# Altium PCB pcb.PcbDoc
Units mm, origin at the board's own origin, x right, y up, seen from the top; angles counter-clockwise.
Board outline 100 x 100 mm, 2 copper layers (Top Layer, Bottom Layer); 24 components, 18 nets, 68 pads, 8 vias.
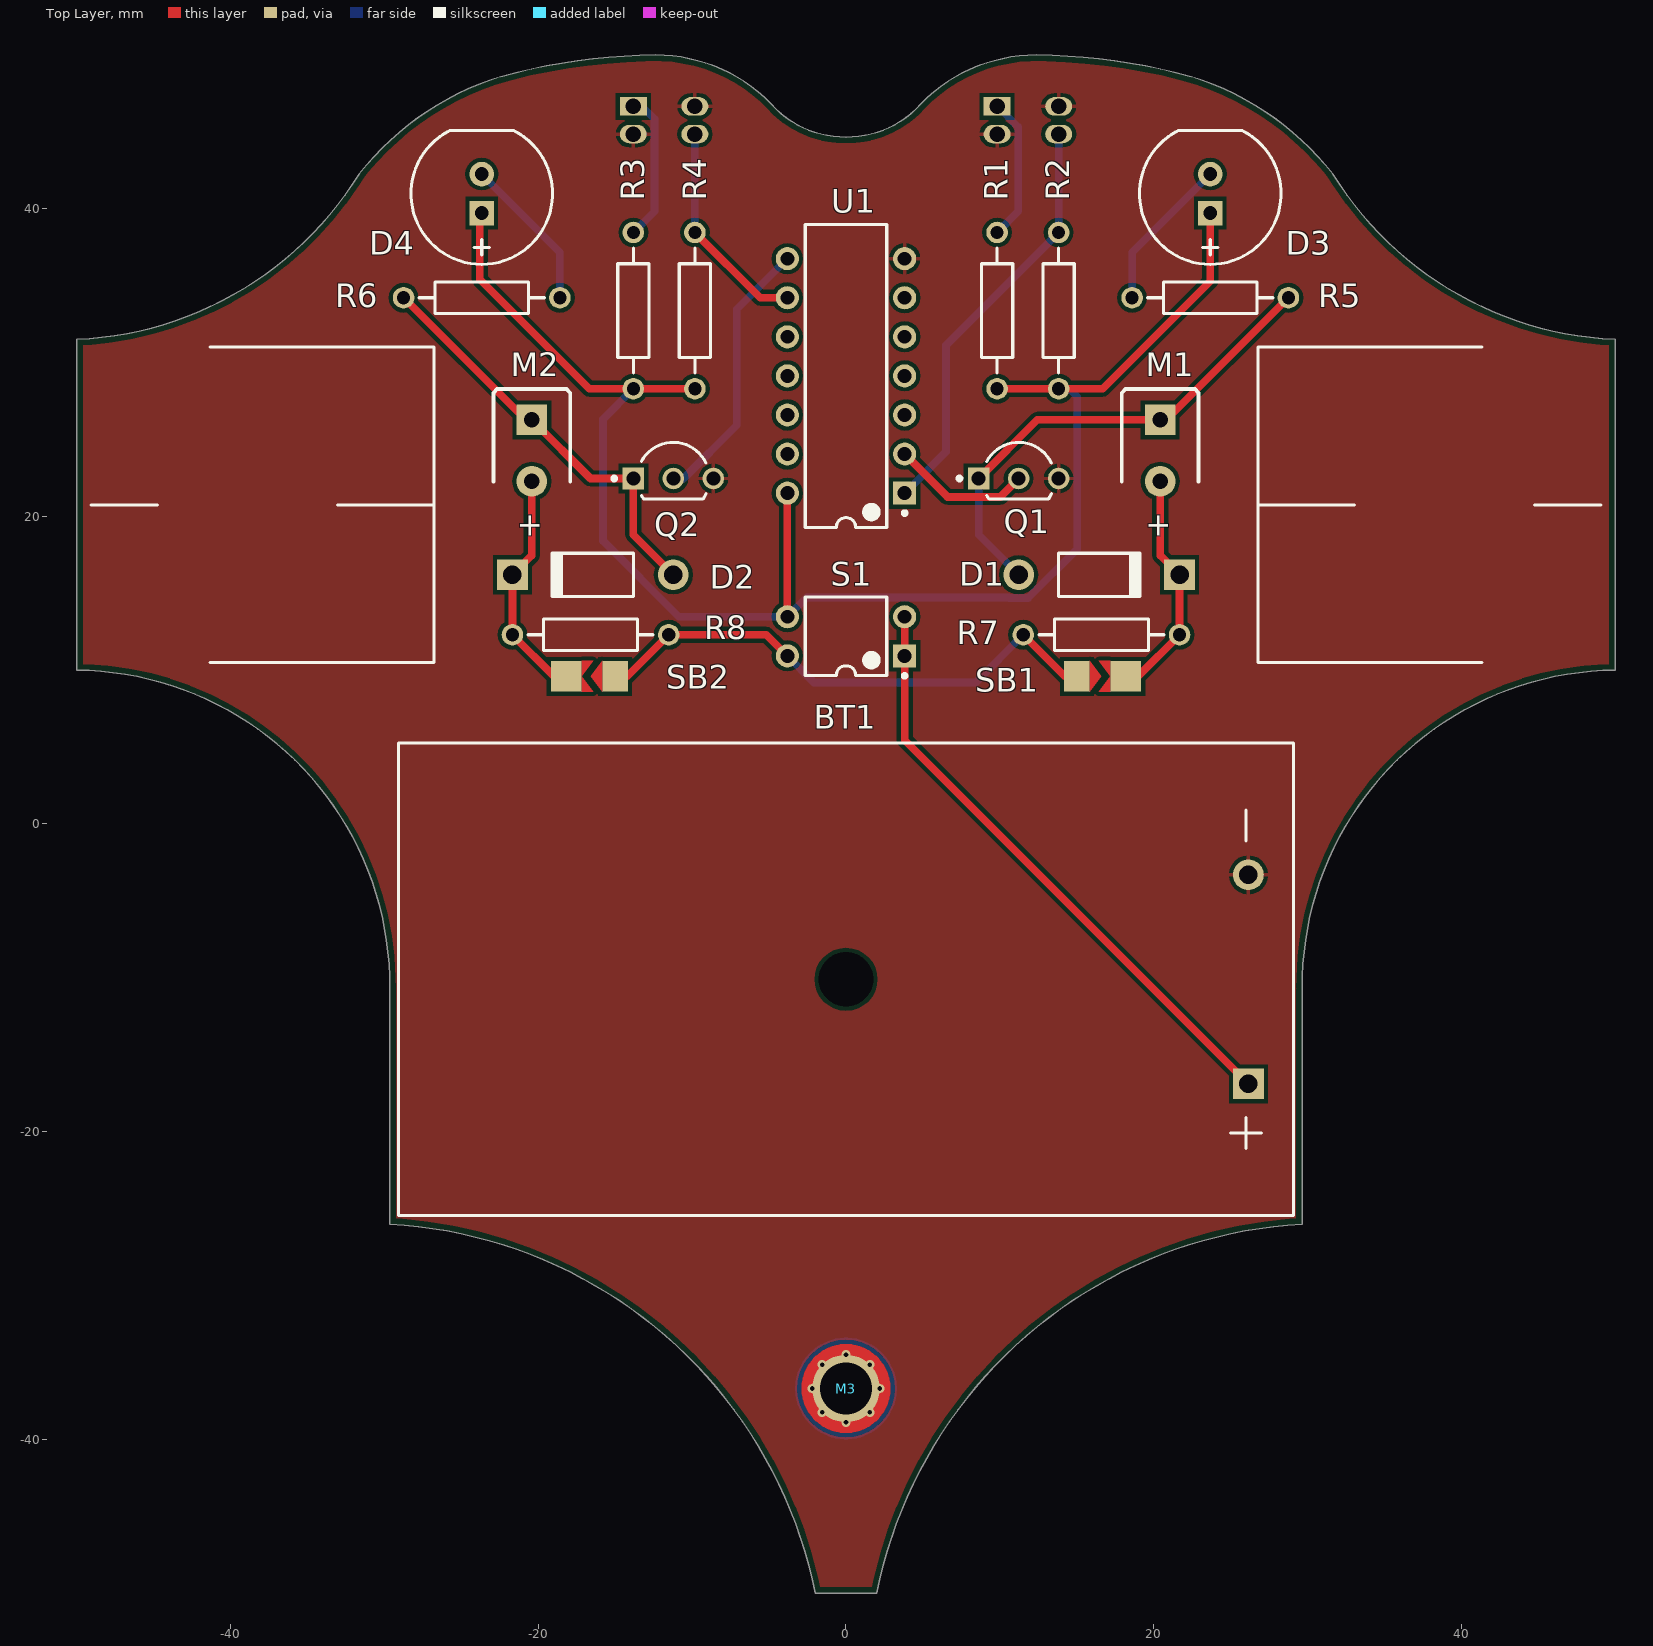
[diagram p0: Top Layer view]
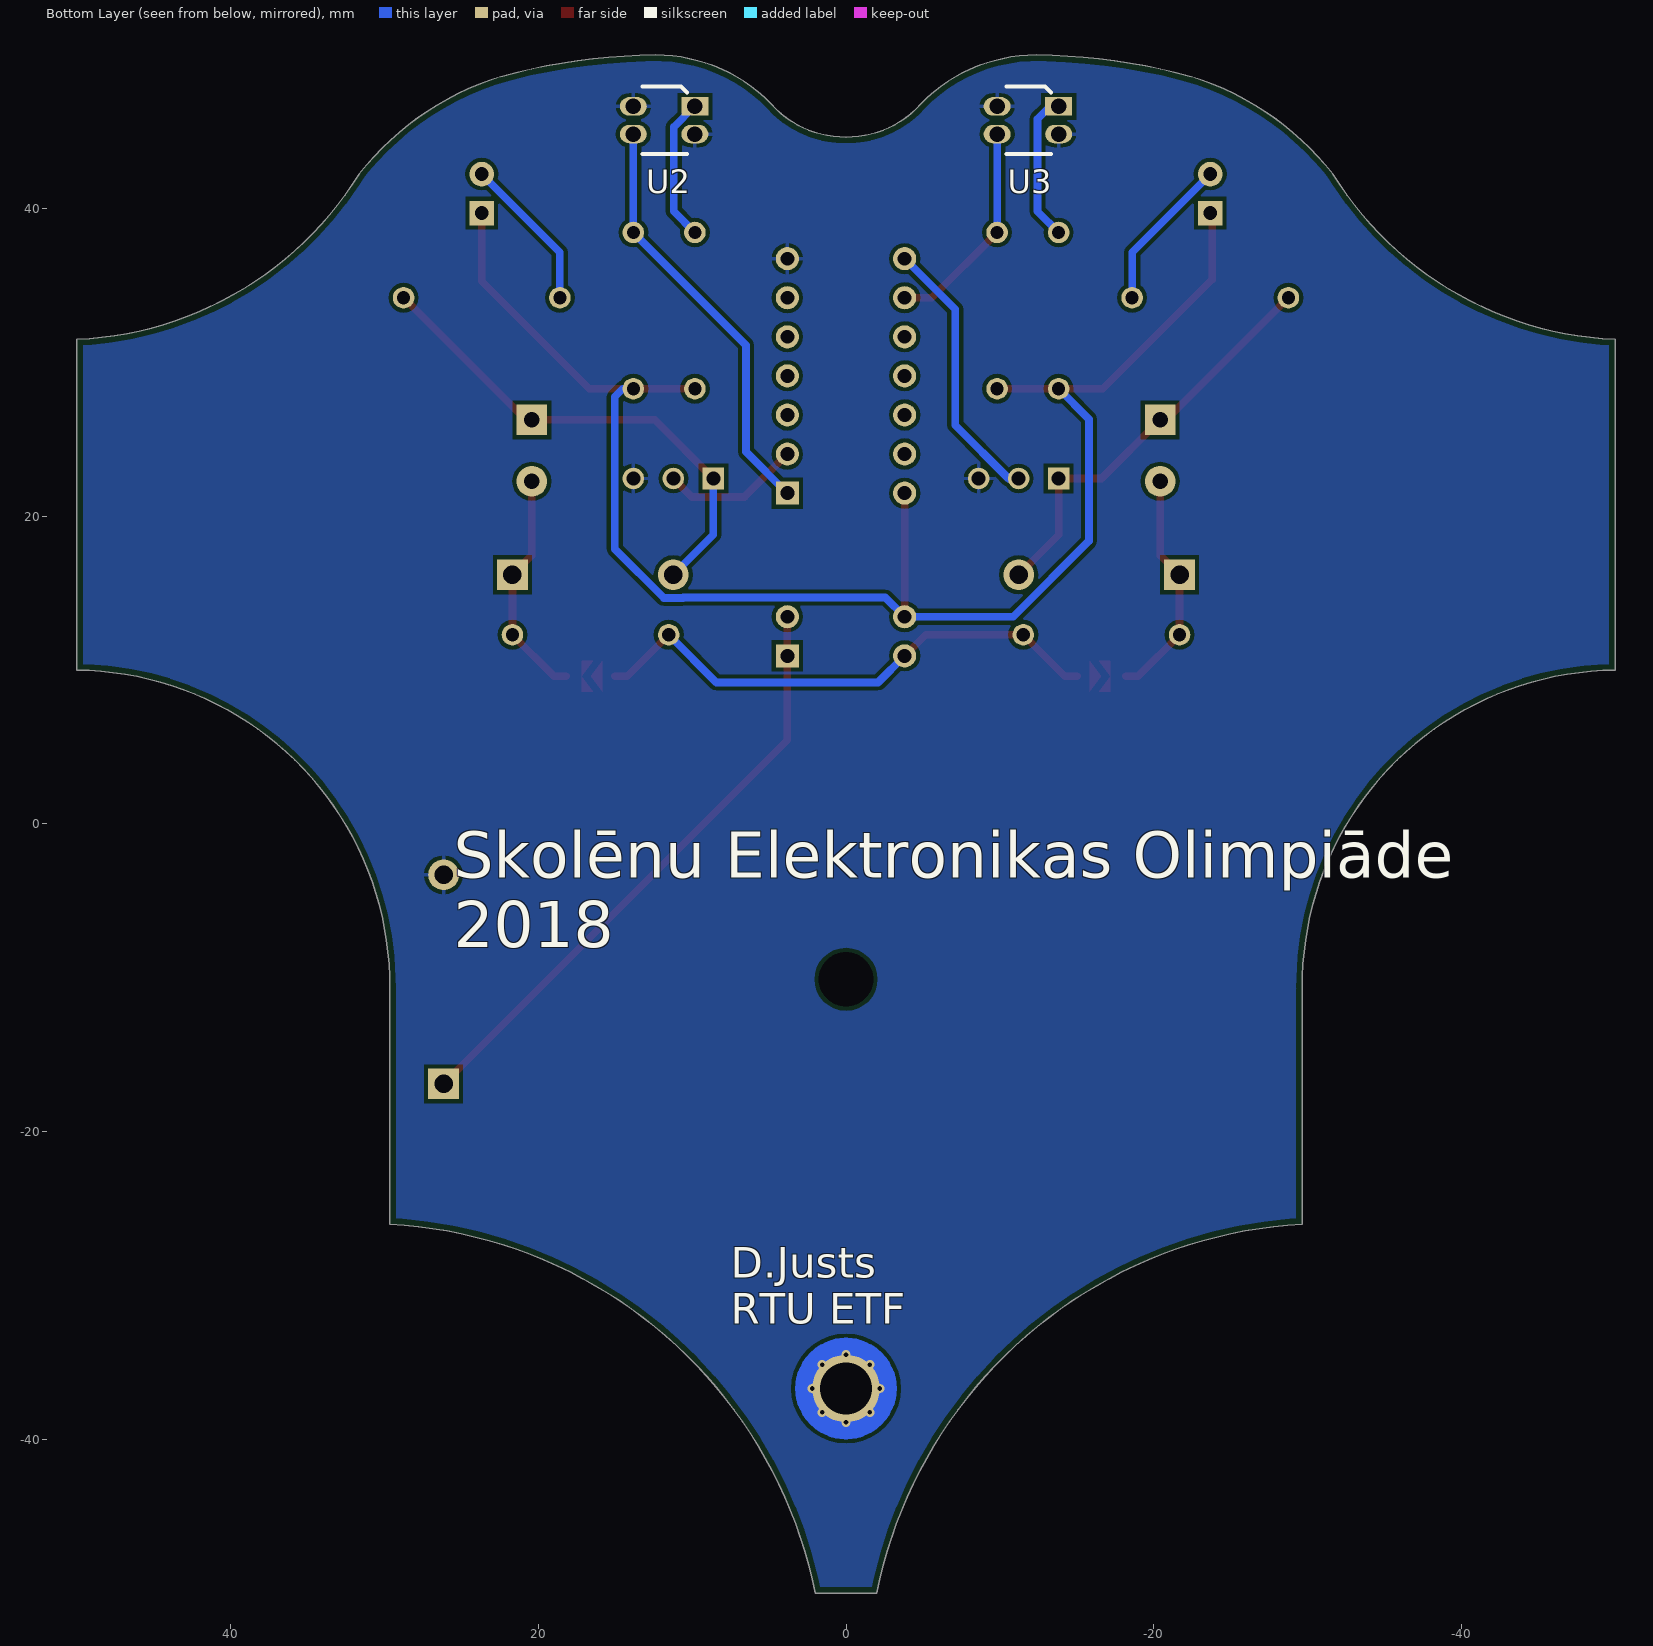
[diagram p1: Bottom Layer view, seen from below]

## Layer stack, top to bottom
Top Solder: solder mask 0.0102, Solder Resist, Dk 3.5
Top Layer: signal copper 0.0356
Dielectric 1: dielectric 0.32, FR-4, Dk 4.8
Bottom Layer: signal copper 0.0356
Bottom Solder: solder mask 0.0102, Solder Resist, Dk 3.5

## Board outline
-29.662,-26.02 -29.662,-10.675 ccw(c-50.169,-10.506) -50,10 -50,31.5 ccw(c-50.992,54.223) -31.654,42.25 cw(c-16.84,30.597) -22.444,48.593 cw(c-11.982,10.433) -12.375,49.999 cw(c-12.387,39.515) -4.525,46.45 ccw(c-0.016,51.198) 0,44.65 ccw(c0.016,51.198) 4.525,46.45 cw(c12.387,39.515) 12.375,49.999 cw(c11.982,10.433) 22.444,48.593 cw(c16.84,30.597) 31.654,42.25 ccw(c50.992,54.223) 50,31.5 50,10 ccw(c50.169,-10.506) 29.662,-10.675 29.662,-26.02 ccw(c31.295,-55.849) 2,-50 -2,-50 ccw(c-31.295,-55.849)

## Design rules (kind name [scope] priority, off if disabled: settings)
BoardOutlineClearance [All] p1: gap=0.4 ignorepadtopadclearanceinfootprint=FALSE
Clearance [All] p1: gap=0.254 ignorepadtopadclearanceinfootprint=FALSE except(0: Arc-Hole Track-Hole SMDPad-Hole THPad-Hole Via-Hole Fill-Hole Poly-Hole Region-Hole Text-Hole)
HoleSize [All] p1: absolutevalues=TRUE maxlimit=3.6 minlimit=0.025 maxpercent=80.000 minpercent=20.000
PolygonConnect [All] p1: connectstyle=Relief reliefconductorwidth=0.254 reliefentries=4 polygonreliefangle="90 Angle" airgapwidth=0.254
RoutingVias [All] p1: holewidth=0.711 width=1.27 viastyle="Through Hole" minholewidth=0.711 minwidth=1.27 maxholewidth=0.711 maxwidth=1.27
SolderMaskExpansion [All] p1: expansion=0.102
Width Width_1 [InComponent('M3')] p1: maxlimit=2 minlimit=0.1 preferedwidth=0.254 minimp=50.000000 maximp=50.000000 favimp=50.000000
Width [All] p2: maxlimit=1 minlimit=0.3 preferedwidth=0.5 minimp=50.000000 maximp=50.000000 favimp=50.000000
29 further rules are at their usual default settings.

## Components (designator, comment, footprint, x,y, rotation, side; value= is the part's Value field where it differs from the comment)
BT1 "Battery" BC2AAPC 0,-10.1 r0 top
D1 "Diode 1N4001" DO-41 16.455,16.2 r0 top
D2 "Diode 1N4001" DO-41 -16.455,16.2 r180 top
D3 "LED" LED 23.68,40.98 r90 top locked
D4 "LED" LED -23.68,40.98 r90 top locked
M1 "Motor" "Motor Wire Footprint" 20.425,24.275 r270 top
M2 "Motor" "Motor Wire Footprint" -20.425,24.275 r270 top
M3 "Comment" LIBRARYSOURCE=Vault 0,-36.7 r0 top
Q1 "BC517RL1" ONSC-TO-92-3-29-11_AM_BL 11.225,22.46 r0 top
Q2 "BC517RL1" ONSC-TO-92-3-29-11_AM_BL -11.225,22.46 r0 top
R1 "Res2" AXIAL-0.4 9.825,33.373 r270 top locked
R2 "Res2" AXIAL-0.4 13.825,33.373 r270 top locked
R3 "Res2" AXIAL-0.4 -13.825,33.373 r270 top locked
R4 "Res2" AXIAL-0.4 -9.825,33.373 r270 top locked
R5 "Res2" AXIAL-0.4 23.68,34.21 r180 top locked
R6 "Res2" AXIAL-0.4 -23.68,34.21 r0 top locked
R7 "Res2" AXIAL-0.4 16.605,12.3 r180 top
R8 "Res2" AXIAL-0.4 -16.605,12.3 r0 top
S1 "SW DIP-2" DIP-4 0,12.2 r180 top
SB1 "Solder Bridge" "Solder Bridge" 16.6,9.6 r0 top
SB2 "Solder Bridge" "Solder Bridge" -16.6,9.6 r180 top
U1 "SN74HC14N" N0014A 0,29.13 r180 top
U2 "QRE1113" QRE1113_THD 11.825,45.75 r0 bottom locked
U3 "QRE1113" QRE1113_THD -11.825,45.75 r0 bottom locked

## Footprints (in the part's own frame and the unit in brackets; to place one, negate y for a bottom-side part, rotate by r counter-clockwise, add the part's x,y. Pads: shape width x height; smd on the part's side, far side on the other; paste and mask are expansions set on the pad)
AXIAL-0.4 [mm] "Axial Device, Thru-Hole; 2 Leads; 0.4 in Pin Spacing"
  round 1.4 hole 0.85: 1(-5.08,0) 2(5.08,0)
  silkscreen extent -4.06,-1.02 4.06,1.02
BC2AAPC [mm] "BC2AAPC Battery Holder 58x30.5x15mm, For 2xAA batteries"
  rect 2x2 hole 1.2: 1(26.16,-6.795)
  round 2 hole 1.2: 2(26.16,6.795)
  round 2 hole 3.56 unplated: MH(0,0)
  silkscreen extent -29.1,-15.36 29.1,15.36, body extent -28.96,-15.24 28.96,15.24, height 15
DIP-4 [mm] "DIP; 4 Leads; Row Spacing 7.62 mm; Pitch 2.54 mm"
  rect 1.5x1.5 hole 0.9: 1(-3.81,1.27)
  round 1.5 hole 0.9: 2(-3.81,-1.27) 3(3.81,-1.27) 4(3.81,1.27)
  silkscreen extent -3.94,-2.55 2.65,2.69, body extent -3.15,-2.5 3.15,2.5, height 5.6
DO-41 [mm] "Diode, Axial; Body 5.2 x 2.7 mm (LxDia. max), Lead Dia. 0.86 mm (max)"
  round 2 hole 1.2: 1(-5.23,0)
  rect 2x2 hole 1.2: 2(5.23,0)
  silkscreen extent -2.65,-1.4 2.75,1.4
LED [mm] "THD LED Bulb dia - 8mm, Height - 11mm, Hole size - 0.9mm, Pad spacing - 2.54mm"
  rect 1.6x1.6 hole 0.9: 1(-1.27,0)
  round 1.6 hole 0.9: 2(1.27,0)
  silkscreen extent -4.6,-4.6 4.09,4.6
LIBRARYSOURCE=Vault [mm] "Mounting Hole, Altium, 4.4mm pad, 3.4mm plated hole"
  round 4.4 hole 3.4 mask+0.038: MOUNT(0,0)
  Top Layer circle w1: c0,0 r2.4
  Bottom Layer circle w1.2: c0,0 r2.702
"Motor Wire Footprint" [mm]
  round 2 hole 1: 1(2,0)
  rect 2x2 hole 1: 2(-2,0)
  silkscreen extent -4,-2.5 2,2.5
N0014A [mm] "DIP, 14-Leads, Body 19.7x6.6mm, Pitch 2.54mm"
  rect 1.5x1.5 hole 0.9: 1(-3.81,7.62)
  round 1.5 hole 0.9: 2(-3.81,5.08) 3(-3.81,2.54) 4(-3.81,0) 5(-3.81,-2.54) 6(-3.81,-5.08) 7(-3.81,-7.62) 8(3.81,-7.62) 9(3.81,-5.08) 10(3.81,-2.54) 11(3.81,0) 12(3.81,2.54) 13(3.81,5.08) 14(3.81,7.62)
  silkscreen extent -3.94,-9.85 2.65,9.85, body extent -3.95,-9.85 3.95,9.85, height 5.08
ONSC-TO-92-3-29-11_AM_BL [mm] "TO, 3-Leads, Body Dia 4.7mm, Pitch 2.6mm"
  rect 1.4x1.4 hole 0.9: 1(-2.6,0)
  round 1.4 hole 0.9: 2(0,0) 3(2.6,0)
  silkscreen extent -3.97,-1.34 2.13,2.35, body extent -2.84,-1.34 2.84,2.35, height 5.33
QRE1113_THD [mm]
  rect 1.75x1.2 hole 1: 1(-2,-0.9)
  oval 1.75x1.2 hole 1: 2(2,-0.9) 3(2,0.9) 4(-2,0.9)
  silkscreen extent -1.5,-2.2 1.4,2.2, body extent -1.35,-1.7 1.35,1.7, height 1.6
"Solder Bridge" [mm] "Solder Bridge 5x2mm, gap 0.6mm"
  rect 1.65x2 smd: 1(-1.587,0)
  rect 2x2 smd: 2(1.587,0)
  Top Layer region: 0.587,0 0.587,-1 -0.162,-1
  Top Layer region: -0.162,1 0.587,1 0.587,0
  Top Layer region: -0.012,0 -0.763,1 -0.763,-1

## Part data
BT1: "Multicell Battery"
D1 D2: "1 Amp General Purpose Rectifier"
D3 D4: library part LED0, "Typical INFRARED GaAs LED"
M1 M2: "Motor, General Kind"
Q1 Q2: library part CMP-1031-00058-1, "Darlington Transistor, NPN Silicon, 3-Pin TO-92, Tape and Reel"
R1 R2 R3 R4 R5 R6 R7 R8: "Resistor"
S1: "DIP Switch, 2 Position, SPST"
U1: library part CMP-1615-00889-3, "Hex Schmitt-Trigger Inverters, N0014A, TUBE"
U2 U3: library part CMP-2000-06919-1, "Miniature Reflective Object Sensor, 30 V, -40 to 85 degC, 4-Pin THD, RoHS, Tape and Reel"

## Via types
v1: diameter 0.6, hole 0.3, Top Layer to Bottom Layer, 8 vias

## Nets (pads, with @x,y where several pads share a name; then routed paths per layer and width w, separated by ;. In a path a pad name is that pad's centre, name@x,y a point inside that pad or via, vN(x,y) a via of type N, cw(c..) or ccw(c..) an arc to the next point about the centre after c; other vN are vias at no path point)
GND: BT1.2 Q1.3 Q2.3 U1.7 U2.2 U2.4 U3.2 U3.4
M3: M3.MOUNT
  other v1: 0,-38.9 -1.556,-38.256 1.556,-38.256 -2.2,-36.7 2.2,-36.7 -1.556,-35.144 1.556,-35.144 0,-34.5
NetBT1_1: BT1.1 S1.1 S1.2 | length 39.6
  Top Layer w0.5: S1.2 S1.1 3.81,5.455 BT1.1
NetD1_1: D1.1 M1.2 Q1.1 R5.1 | length 32.3
  Top Layer w0.5: Q1.1 12.44,26.275 M1.2 20.825,26.275 R5.1
  Bottom Layer w0.5: Q1.1 8.625,18.8 D1.1
NetD1_2: D1.2 M1.1 R7.1 SB1.2 | length 15.1
  Top Layer w0.5: SB1.2 18.985,9.6 R7.1 D1.2 20.425,17.46 M1.1
NetD2_1: D2.1 M2.2 Q2.1 R6.1 | length 27.1
  Top Layer w0.5: R6.1 -20.825,26.275 M2.2 -16.611,22.46 Q2.1 -13.825,18.8 D2.1
NetD2_2: D2.2 M2.1 R8.1 SB2.2 | length 15.1
  Top Layer w0.5: M2.1 -20.425,17.46 D2.2 R8.1 -18.985,9.6 SB2.2
NetD3_2: D3.2 R5.2 | length 10.1
  Bottom Layer w0.5: R5.2 18.6,37.17 D3.2
NetD4_2: D4.2 R6.2 | length 10.1
  Bottom Layer w0.5: D4.2 -18.6,37.17 R6.2
NetQ1_2: Q1.2 U1.2 | length 9.1
  Top Layer w0.5: U1.2 6.604,21.256 10.021,21.256 Q1.2
NetQ2_2: Q2.2 U1.8 | length 17.7
  Bottom Layer w0.5: Q2.2 -10.565,22.46 -7.1,25.925 -7.1,33.46 U1.8
NetR1_1: R1.1 U2.1 | length 9.4
  Bottom Layer w0.5: R1.1 11.204,39.832 11.204,45.307 9.861,46.65 U2.1
NetR2_1: R2.1 U1.1 U2.3 | length 27.5
  Bottom Layer w0.5: U1.1 6.5,24.2 6.5,31.128 R2.1 U2.3
NetR3_1: R3.1 U3.1 | length 9.7
  Bottom Layer w0.5: R3.1 -12.446,39.832 -12.446,45.825 -13.271,46.65 U3.1
NetR4_1: R4.1 U1.9 U3.3 | length 14.2
  Top Layer w0.5: R4.1 -5.582,34.21 U1.9
  Bottom Layer w0.5: R4.1 U3.3
SCREW: 
VCC: D3.1 D4.1 R1.2 R2.2 R3.2 R4.2 S1.3 U1.14 | length 107.2
  Top Layer w0.5: D4.1 -23.8,39.59 -23.8,35.4 -16.693,28.293 R3.2 R4.2 ; S1.3 U1.14 ; R1.2 R2.2 16.693,28.293 23.68,35.28 D3.1
  Bottom Layer w0.5: R3.2 -15.8,26.318 -15.8,18.4 -10.87,13.47 S1.3 -2.556,14.724 10.574,14.724 10.602,14.696 11.848,14.696 15.029,17.877 15.029,27.771 14.507,28.293 R2.2
VMOT: R7.2 R8.2 S1.4 SB1.1 SB2.1 | length 34.8
  Top Layer w0.5: SB2.1 -14.225,9.6 R8.2 -5.18,12.3 S1.4 ; R7.2 14.225,9.6 SB1.1
  Bottom Layer w0.5: S1.4 -2.08,9.2 8.425,9.2 R7.2
pads on no net: BT1.MH U1.3 U1.4 U1.5 U1.6 U1.10 U1.11 U1.12 U1.13

## Polygon pours and split planes (outlines as drawn)
GND on Bottom Layer "GND" (solid, remove dead copper, pour order 0): -29.662,-26.02 -29.662,-10.675 ccw(c-50.169,-10.506) -50,10 -50,31.5 ccw(c-50.992,54.223) -31.654,42.25 cw(c-16.84,30.597) -22.444,48.593 cw(c-11.982,10.433) -12.375,49.999 cw(c-12.387,39.515) -4.525,46.45 ccw(c-0.016,51.198) 0,44.65 ccw(c0.016,51.198) 4.525,46.45 cw(c12.387,39.515) 12.375,49.999 cw(c11.982,10.433) 22.444,48.593 cw(c16.84,30.597) 31.654,42.25 ccw(c50.992,54.223) 50,31.5 50,10 ccw(c50.169,-10.506) 29.662,-10.675 29.662,-26.02 ccw(c31.295,-55.849) 2,-50 -2,-50 ccw(c-31.295,-55.849)
GND on Top Layer "GND" (solid, remove dead copper, pour order 1): -29.662,-26.02 -29.662,-10.675 ccw(c-50.169,-10.506) -50,10 -50,31.5 ccw(c-50.992,54.223) -31.654,42.25 cw(c-16.84,30.597) -22.444,48.593 cw(c-11.982,10.433) -12.375,49.999 cw(c-12.387,39.515) -4.525,46.45 ccw(c-0.016,51.198) 0,44.65 ccw(c0.016,51.198) 4.525,46.45 cw(c12.387,39.515) 12.375,49.999 cw(c11.982,10.433) 22.444,48.593 cw(c16.84,30.597) 31.654,42.25 ccw(c50.992,54.223) 50,31.5 50,10 ccw(c50.169,-10.506) 29.662,-10.675 29.662,-26.02 ccw(c31.295,-55.849) 2,-50 -2,-50 ccw(c-31.295,-55.849)

## Silkscreen, mask and mechanical layers (free items; w line width, h text height)
Top Overlay:
  lines w0.2: -49.075,20.74 -44.755,20.74 ; -41.355,10.5 -26.775,10.5 -26.775,31 -41.355,31 ; -33.055,20.75 -26.775,20.75 ; 26.775,20.75 33.055,20.75 ; 26.775,31 26.775,10.5 41.355,10.5 ; 26.785,31 41.355,31 ; 44.755,20.74 49.075,20.74
Bottom Overlay:
  text "Skolēnu Elektronikas Olimpiāde / 2018" at 25.5,-8 h3
  text "D.Justs / RTU ETF" at 7.5,-32.5 h2
Mechanical 15:
  lines w0.2: -50,10 cw(c-50.169,-10.506) -29.662,-10.675 -29.662,-26.02 cw(c-31.295,-55.849) -2,-50 0,-50 2,-50 cw(c31.295,-55.849) 29.662,-26.02 29.662,-10.675 cw(c50.169,-10.506) 50,10 50,31.5 cw(c50.992,54.223) 31.654,42.25 ccw(c16.84,30.597) 22.444,48.593 ccw(c11.982,10.433) 12.375,49.999 ccw(c12.387,39.515) 4.525,46.45 cw(c0.016,51.198) 0,44.65 cw(c-0.016,51.198) -4.525,46.45 ccw(c-12.387,39.515) -12.375,49.999 ccw(c-11.982,10.433) -22.444,48.593 ccw(c-16.84,30.597) -31.654,42.25 cw(c-50.992,54.223) -50,31.5 -50,10

## Text inside footprints (layer, text, board x,y; h text height)
M1: Top Overlay "+" at 19.675,20.275 h1.52 r270
M2: Top Overlay "+" at -21.175,20.275 h1.52 r270